# EAGLE board Octoprober (EAGLE 6.5.0)
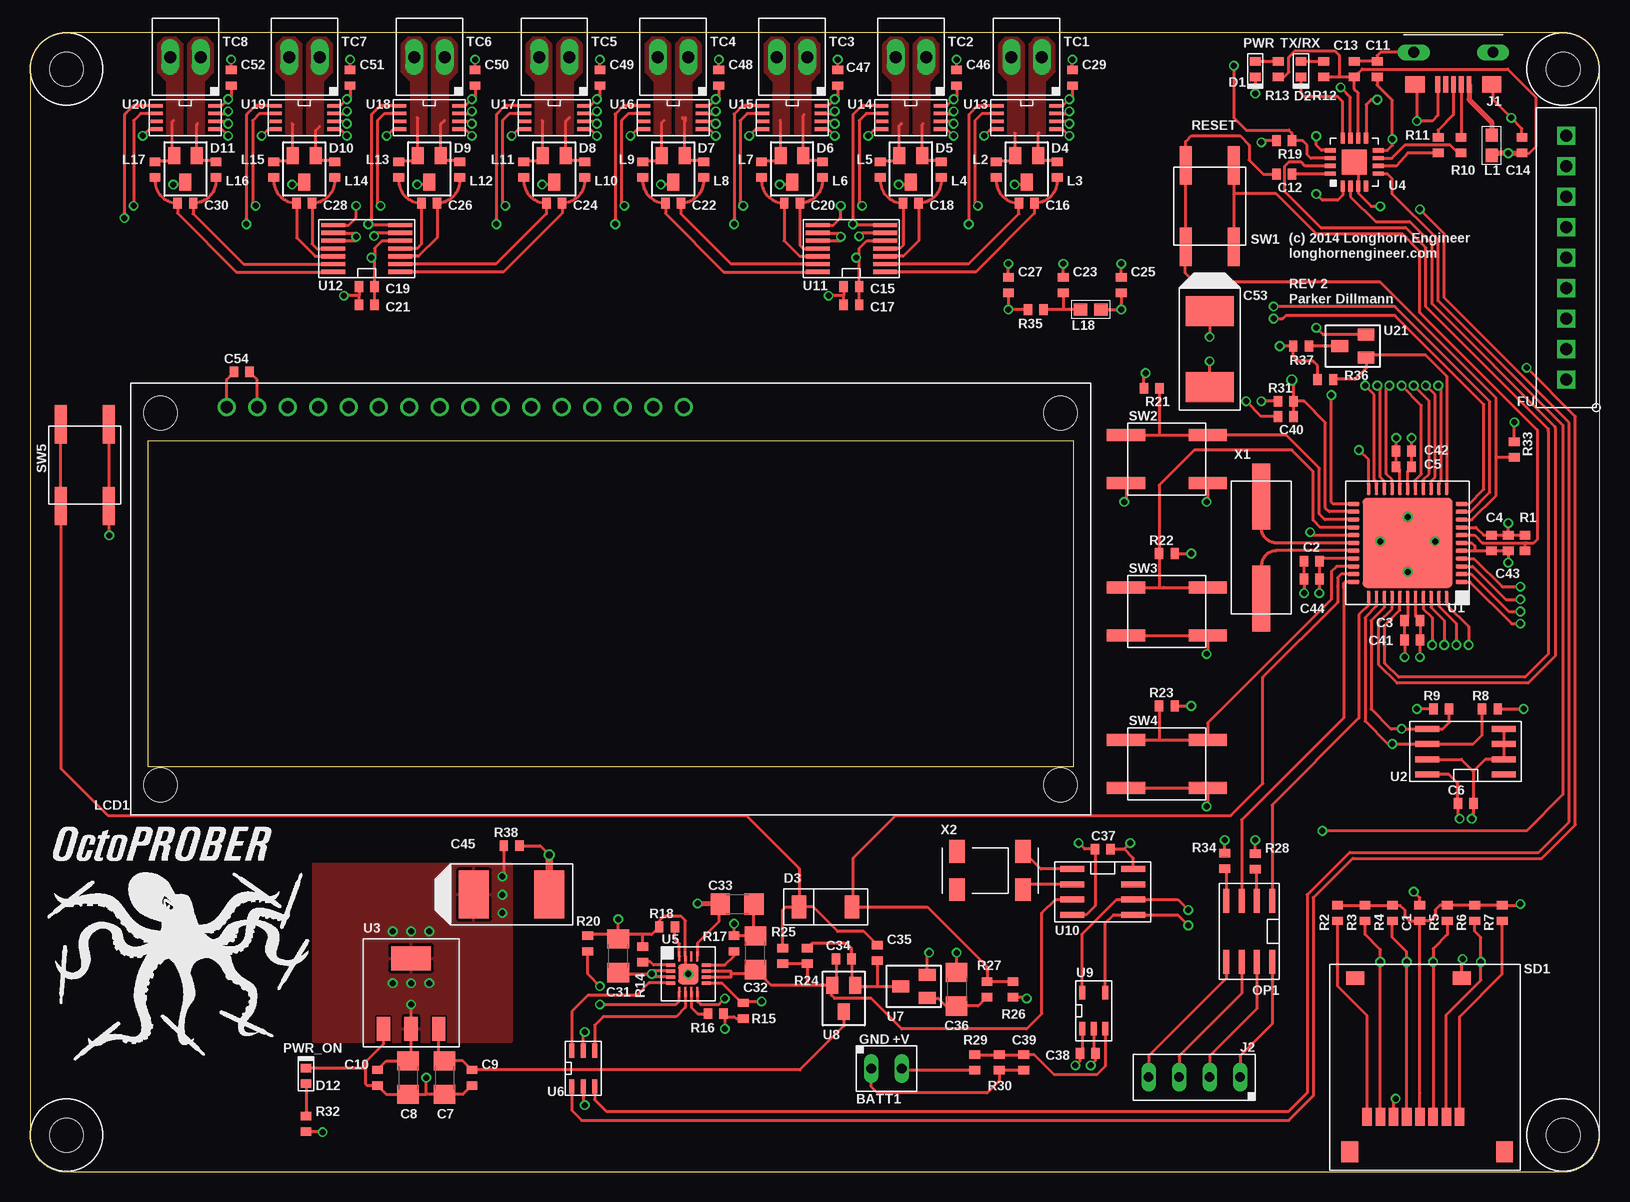
[diagram p0: board, top side]
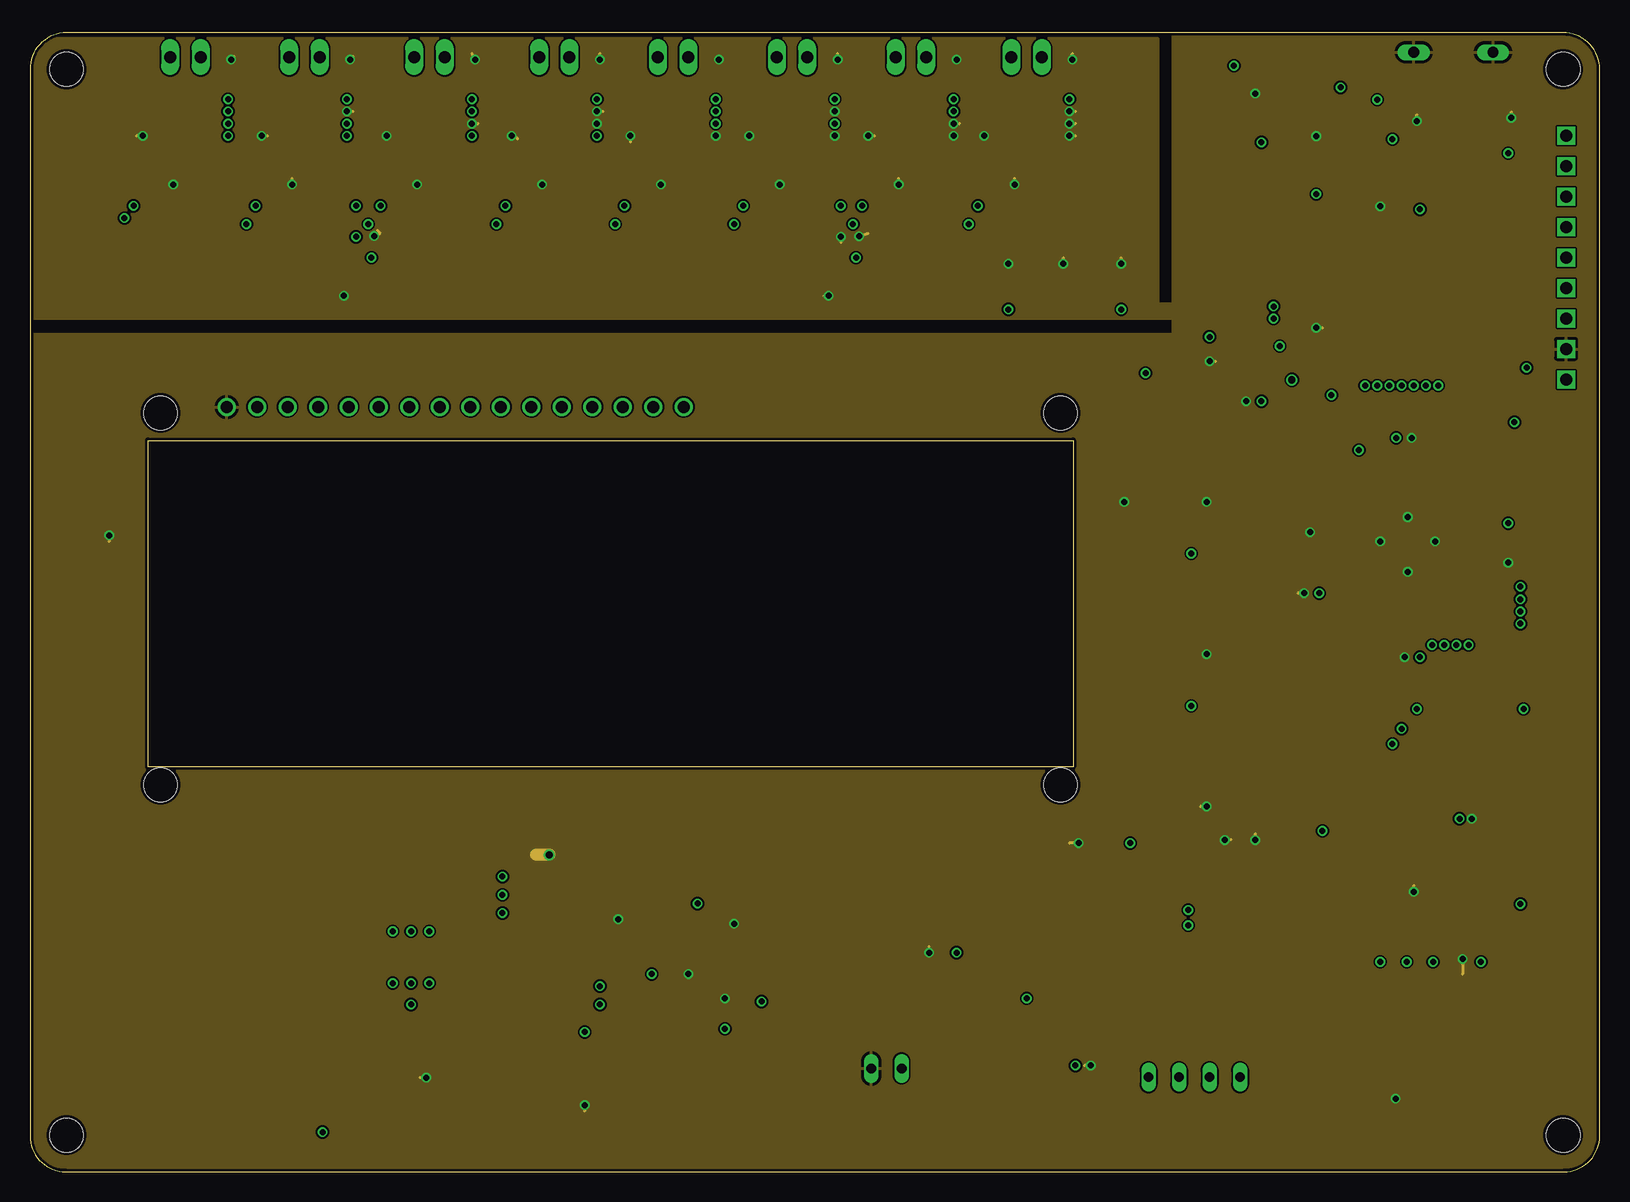
[diagram p1: board, inner layer Route2]
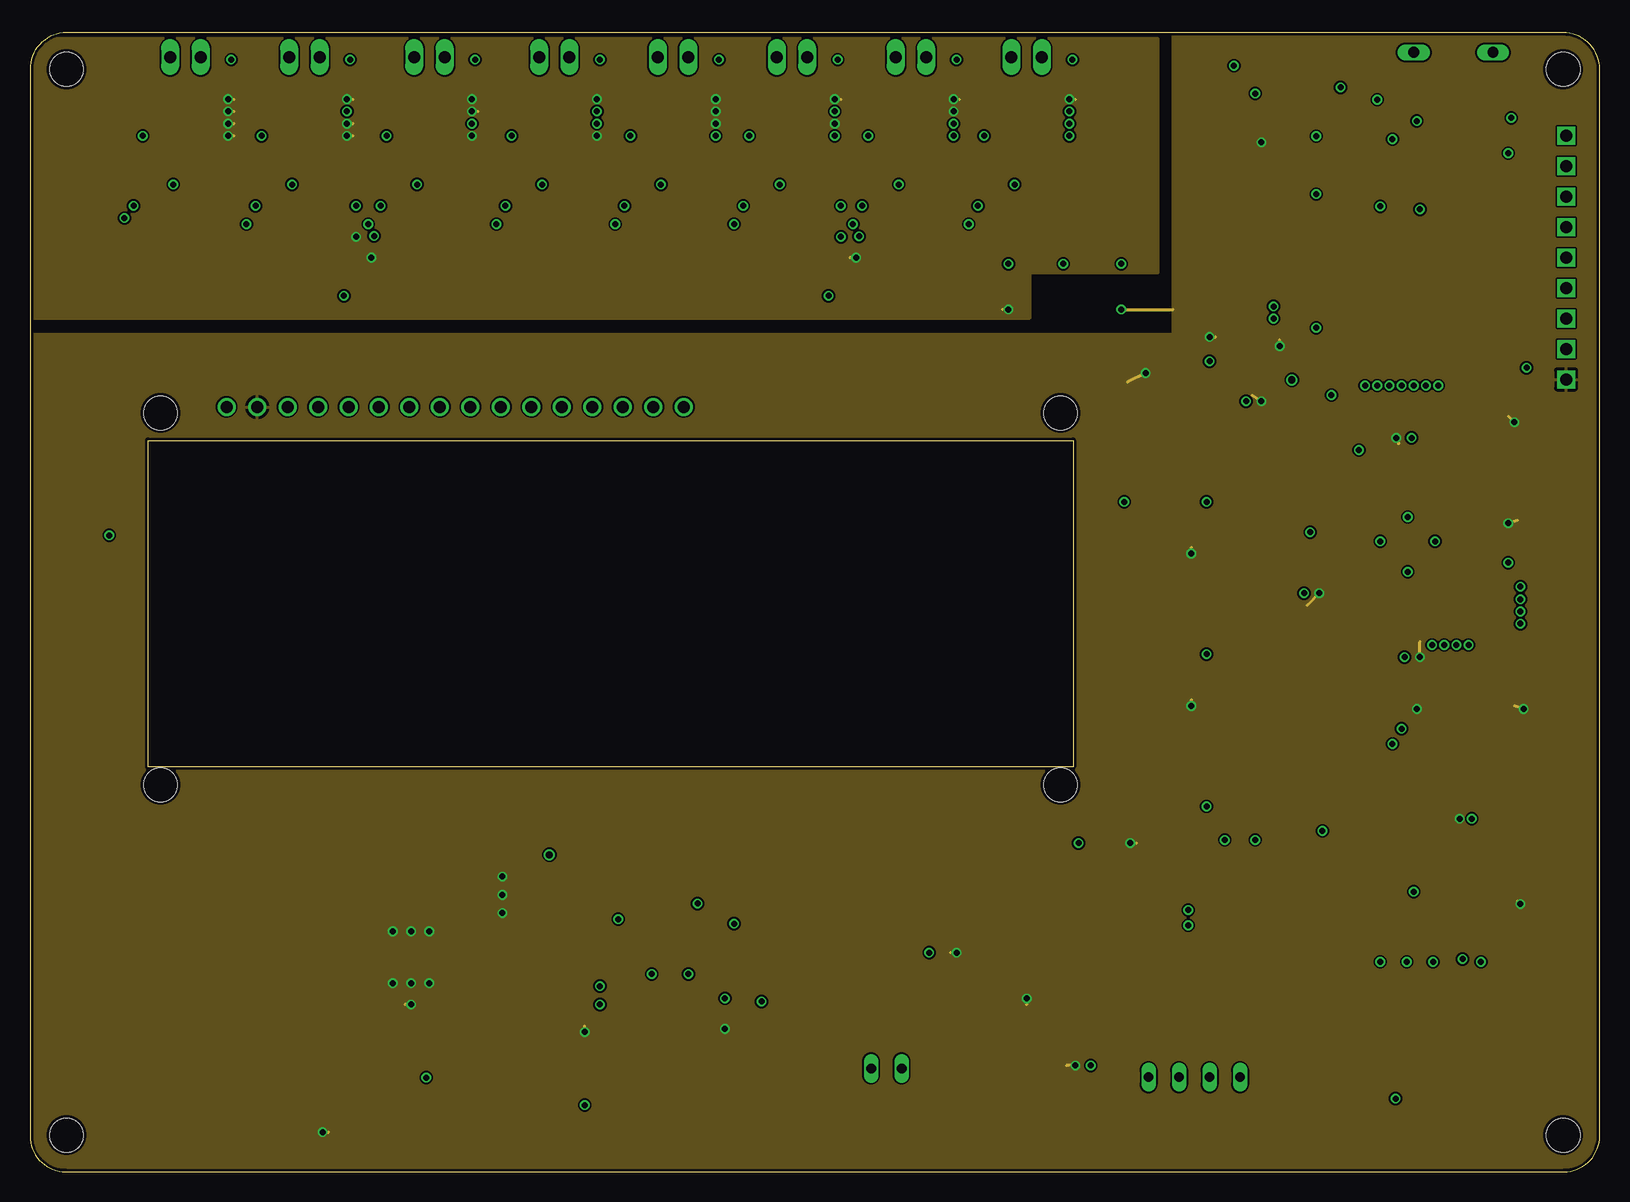
[diagram p2: board, inner layer Route15]
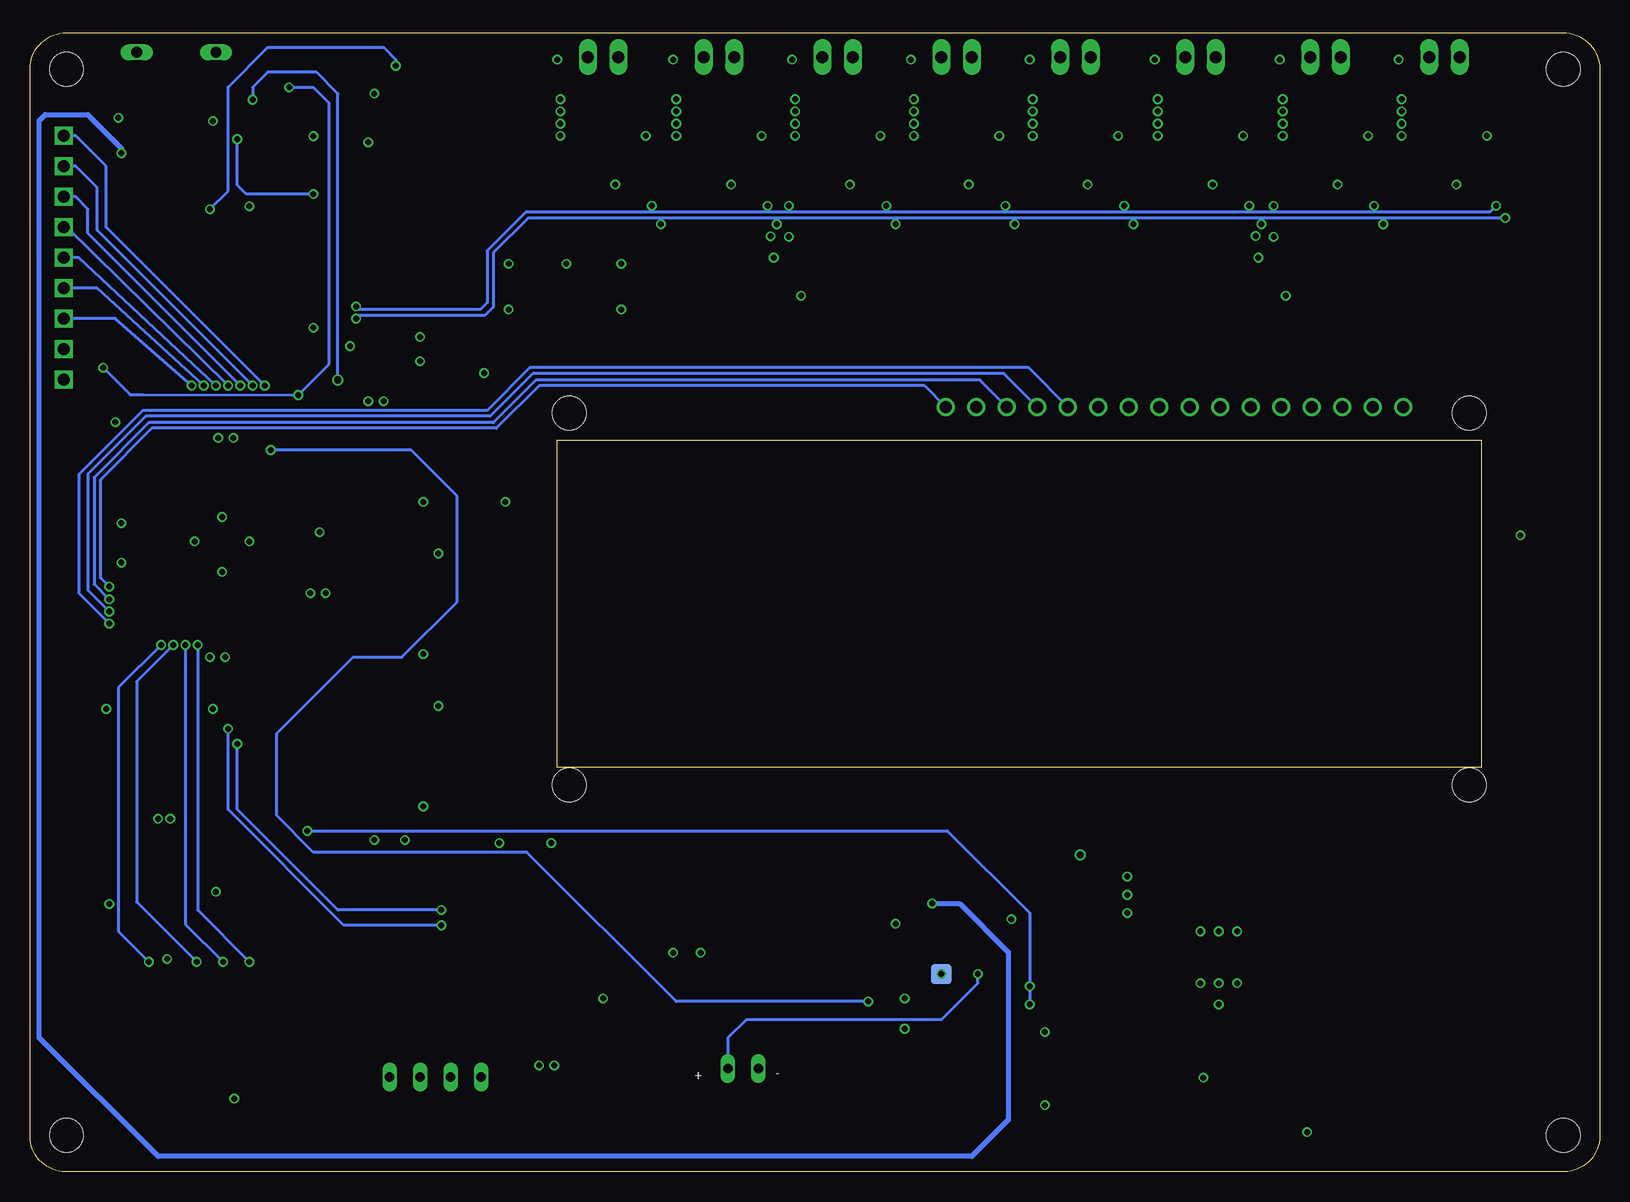
[diagram p3: board, bottom side, seen from below]

Size 130.81 x 94.96 mm. Coordinates in mm from the lower left corner, seen from the top.
Outline: 130.81,2.97 130.81,91.91 arc90 127.75,94.96 3.06,94.96 arc90 0,91.91 0,2.97 arc90 2.97,0 127.84,0 arc90 130.81,2.97
Copper layers (1*2*15*16): Top 0.035mm / dielectric 0.2mm / Route2 0.0175mm / dielectric 1.1mm / Route15 0.0175mm / dielectric 0.2mm / Bottom 0.035mm
Design rules "Seeed_4_Layer_DRU": minimum track width 6mil, minimum drill 12mil, track to track 6mil, track to pad 6mil, pad to pad 6mil, via to via 6mil, smd to smd 0mil, copper to edge 10mil, drill to drill 10mil, minimum pad ring 6mil, minimum via ring 6mil, stop-mask expansion 2mil, vias tented up to drill 25mil, thermal gap 10mil
tRestrict: area 100.2,44.9 to 105.2,59.1

## Footprints (pad centres in the part's own frame; a part is rotated, then mirrored left to right if it is on the bottom)
HEADER_01X02_PTH = drill 0.8 long: 1 0,0; 2 2.54,0
0402 = smd 0.7 x 0.9: 1 -0.65,0; 2 0.65,0
1206 = smd 1.6 x 1.8: 1 -1.4,0; 2 1.4,0
CASE_D = smd 2.5 x 4: N 3.15,0; P -3.15,0
LED_0402 = smd 0.7 x 0.9: ANODE 0.65,0; CATHODE -0.65,0
SOD-128 = smd 1.2 x 1.9: ANODE 2.2,0; CATHODE -2.2,0
SOT-23 = smd 1 x 1.4: 1 -0.95,-1.1; 2 0.95,-1.1; 3 0,1.1
HEADER_01X09_PTH = drill 1 square: 1 -10.16,0; 2 -7.62,0; 3 -5.08,0; 4 -2.54,0; 5 0,0; 6 2.54,0; 7 5.08,0; 8 7.62,0; 9 10.16,0
10118193-0001LF = smd 0.4 x 1.35: 1 -1.3,2.54; 2 -0.65,2.54; 3 0,2.54; 4 0.65,2.54; 5 1.3,2.54 | drill 0.9 long: S1 -3.3,-0.135; S2 3.3,-0.135 | smd 1.6 x 1.4: S3 -3.2,2.54; S4 3.2,2.54
HEADER_01X04_PTH = drill 0.8 long: 1 0,0; 2 2.54,0; 3 5.08,0; 4 7.62,0
0603 = smd 1.1 x 1: 1 -0.85,0; 2 0.85,0
CHAR_DISPLAY_1602_COUNTERSINK = drill 1: 1 8,-2; 2 10.54,-2; 3 13.08,-2; 4 15.62,-2; 5 18.16,-2; 6 20.7,-2; 7 23.24,-2; 8 25.78,-2; 9 28.32,-2; 10 30.86,-2; 11 33.4,-2; 12 35.94,-2; 13 38.48,-2; 14 41.02,-2; 15 43.56,-2; 16 46.1,-2 | hole 2.8: 2.5,-2.5; 77.5,-2.5; 77.5,-33.5; 2.5,-33.5
SOIC-8 = smd 0.5 x 2: 1 -1.905,-2.55; 2 -0.635,-2.55; 3 0.635,-2.55; 4 1.905,-2.55; 5 1.905,2.55; 6 0.635,2.55; 7 -0.635,2.55; 8 -1.905,2.55
502570-0893 = smd 0.8 x 1.5: 1 7.7,0; 2 6.6,0; 3 5.5,0; 4 4.4,0; 5 3.3,0; 6 2.2,0; 7 1.1,0; 8 0,0 | smd 1.4 x 1.73: SHIELD0 -3.75,2.9; SHIELD1 9.15,2.9 | smd 1.5 x 1.15: SHIELD2 8.7,-11.575; SHIELD3 -0.2,-11.575
EVQ-Q2203W = smd 3.2 x 1: 1 -3.4,-2; 2 3.4,-2; 3 -3.4,2; 4 3.4,2
HEADER_01X02_PTH_SCREWTERM = drill 1 long: 1 0,0; 2 2.54,0
QFN-44 = smd 1 x 0.33: 1 -4.5,3.25; 2 -4.5,2.6; 3 -4.5,1.95; 4 -4.5,1.3; 5 -4.5,0.65; 6 -4.5,0; 7 -4.5,-0.65; 8 -4.5,-1.3; 9 -4.5,-1.95; 10 -4.5,-2.6; 11 -4.5,-3.25; 23 4.5,-3.25; 24 4.5,-2.6; 25 4.5,-1.95; 26 4.5,-1.3; 27 4.5,-0.65; 28 4.5,0; 29 4.5,0.65; 30 4.5,1.3; 31 4.5,1.95; 32 4.5,2.6; 33 4.5,3.25 | smd 0.33 x 1: 12 -3.25,-4.5; 13 -2.6,-4.5; 14 -1.95,-4.5; 15 -1.3,-4.5; 16 -0.65,-4.5; 17 0,-4.5; 18 0.65,-4.5; 19 1.3,-4.5; 20 1.95,-4.5; 21 2.6,-4.5; 22 3.25,-4.5; 34 3.25,4.5; 35 2.6,4.5; 36 1.95,4.5; 37 1.3,4.5; 38 0.65,4.5; 39 0,4.5; 40 -0.65,4.5; 41 -1.3,4.5; 42 -1.95,4.5; 43 -2.6,4.5; 44 -3.25,4.5 | smd 7.5 x 7.5: PAD 0,0
SOIC-8_W = smd 0.5 x 2: 1 -1.905,-3.185; 2 -0.635,-3.185; 3 0.635,-3.185; 4 1.905,-3.185; 5 1.905,3.185; 6 0.635,3.185; 7 -0.635,3.185; 8 -1.905,3.185
SOT-223 = smd 1.1 x 2: COM1 0,0; IN -2.3,0; OUT 2.3,0 | smd 3.3 x 2: COM2 0,5.9
QFN-16 = smd 0.9 x 0.35: 1 -2,0.975; 2 -2,0.325; 3 -2,-0.325; 4 -2,-0.975; 9 2,-0.975; 10 2,-0.325; 11 2,0.325; 12 2,0.975 | smd 0.35 x 0.9: 5 -0.975,-2; 6 -0.325,-2; 7 0.325,-2; 8 0.975,-2; 13 0.975,2; 14 0.325,2; 15 -0.325,2; 16 -0.975,2 | smd 2.1 x 2.1: PAD 0,0
QFN-16_BOT_PAD = smd 0.85 x 0.28: 1 -1.475,0.75; 2 -1.475,0.25; 3 -1.475,-0.25; 4 -1.475,-0.75; 9 1.475,-0.75; 10 1.475,-0.25; 11 1.475,0.25; 12 1.475,0.75 | smd 0.28 x 0.85: 5 -0.75,-1.475; 6 -0.25,-1.475; 7 0.25,-1.475; 8 0.75,-1.475; 13 0.75,1.475; 14 0.25,1.475; 15 -0.25,1.475; 16 -0.75,1.475 | smd 1.7 x 1.7: PAD0 0,0 | smd 1.7 x 1.7 bottom: PAD1 0,0
TTSOP-6 = smd 0.4 x 1.2: 1 -0.95,-1.5; 2 0,-1.5; 3 0.95,-1.5; 4 0.95,1.5; 5 0,1.5; 6 -0.95,1.5
SOT-23A = smd 1.1 x 0.5: 1 -1.5,0.95; 2 -1.5,0; 3 -1.5,-0.95; 4 1.5,-0.95; 5 1.5,0.95
TTSOP-14 = smd 0.35 x 2: 1 -1.95,-2.8; 2 -1.3,-2.8; 3 -0.65,-2.8; 4 0,-2.8; 5 0.65,-2.8; 6 1.3,-2.8; 7 1.95,-2.8; 8 1.95,2.8; 9 1.3,2.8; 10 0.65,2.8; 11 0,2.8; 12 -0.65,2.8; 13 -1.3,2.8; 14 -1.95,2.8
MSOP-8 = smd 0.3 x 1: P$1 -0.975,-2.4; P$2 -0.325,-2.4; P$3 0.325,-2.4; P$4 0.975,-2.4; P$5 0.975,2.4; P$6 0.325,2.4; P$7 -0.325,2.4; P$8 -0.975,2.4
MOUNT_HOLE_2.8MM = hole 2.8: 0,0
HC-49/US_SM = smd 5.5 x 1.5: P$1 -4.25,0; P$2 4.25,0
8MM_X_3.8MM = smd 1.3 x 1.9: 1 -2.75,-1.6; 2 2.75,-1.6; 3 2.75,1.6; 4 -2.75,1.6

## Placement (x,y rotation side)
BATT1  MIKROE-1120  [HEADER_01X02_PTH]  70.1,8.6 0 top
C1  0.1uF  [0402]  115.82,21.56 90 top
C2  0.1uF  [0402]  106.81,50.9 180 top
C3  0.1uF  [0402]  115.19,45.94 180 top
C4  0.1uF  [0402]  121.79,52.42 270 top
C5  0.1uF  [0402]  114.49,58.77 0 top
C6  0.1uF  [0402]  119.63,30.7 0 top
C7  10uF  [1206]  34.54,7.84 270 top
C8  10uF  [1206]  31.5,7.84 270 top
C9  0.1uF  [0402]  36.83,7.84 270 top
C10  0.1uF  [0402]  28.96,7.84 270 top
C11  0.1uF  [0402]  112.27,91.92 90 top
C12  0.1uF  [0402]  104.52,83.15 180 top
C13  0.1uF  [0402]  110.36,91.92 90 top
C14  0.1uF  [0402]  124.33,85.57 90 top
C15  0.1uF  [0402]  68.45,73.79 180 top
C16  0.01uF  [0402]  83.06,80.74 0 top
C17  10uF  [0402]  68.45,72.26 180 top
C18  0.01uF  [0402]  73.41,80.74 0 top
C19  10uF  [0402]  28.07,73.79 180 top
C20  0.01uF  [0402]  63.5,80.74 0 top
C21  0.1uF  [0402]  28.07,72.26 180 top
C22  0.01uF  [0402]  53.59,80.74 0 top
C23  10uF  [0402]  86.11,73.91 90 top
C24  0.01uF  [0402]  43.69,80.74 0 top
C25  10uF  [0402]  90.93,73.91 90 top
C26  0.01uF  [0402]  33.27,80.74 0 top
C27  1uF  [0402]  81.53,73.91 90 top
C28  0.01uF  [0402]  22.86,80.74 0 top
C29  0.1uF  [0402]  86.87,91.19 270 top
C30  0.01uF  [0402]  12.95,80.74 0 top
C31  10uF  [1206]  49.02,18 90 top
C32  10uF  [1206]  60.45,18.26 90 top
C33  10uF  [1206]  58.93,22.32 0 top
C34  0.1uF  [0402]  67.82,17.75 0 top
C35  0.1uF  [0402]  70.61,18.26 270 top
C36  10uF  [1206]  77.22,15.21 270 top
C37  0.1uF  [0402]  89.41,26.89 180 top
C38  0.1uF  [0402]  88.14,9.87 0 top
C39  0.1uF  [0402]  82.8,9.11 270 top
C40  0.1uF  [0402]  104.65,62.96 180 top
C41  10uF  [0402]  115.19,44.32 180 top
C42  10uF  [0402]  114.49,60.07 0 top
C43  10uF  [0402]  123.19,52.42 270 top
C44  10uF  [0402]  106.81,49.4 180 top
C45  470uF  [CASE_D]  40.13,23.11 0 top
C46  0.1uF  [0402]  77.22,91.19 270 top
C47  0.1uF  [0402]  67.31,91.19 270 top
C48  0.1uF  [0402]  57.4,91.19 270 top
C49  0.1uF  [0402]  47.5,91.19 270 top
C50  0.1uF  [0402]  37.08,91.19 270 top
C51  0.1uF  [0402]  26.67,91.19 270 top
C52  0.1uF  [0402]  16.76,91.19 270 top
C53  470uF  [CASE_D]  98.3,68.58 270 top
C54  1uF  [0402]  17.65,66.67 0 top
D1  598-8070-107F  [LED_0402]  102.11,91.92 90 top
D2  598-8070-107F  [LED_0402]  105.92,91.92 90 top
D3  PMEG6030EP,115  [SOD-128]  66.29,22.07 0 top
D4  NUP2105LT1G  [SOT-23]  83.06,83.6 180 top
D5  NUP2105LT1G  [SOT-23]  73.41,83.6 180 top
D6  NUP2105LT1G  [SOT-23]  63.5,83.6 180 top
D7  NUP2105LT1G  [SOT-23]  53.59,83.6 180 top
D8  NUP2105LT1G  [SOT-23]  43.69,83.6 180 top
D9  NUP2105LT1G  [SOT-23]  33.27,83.6 180 top
D10  NUP2105LT1G  [SOT-23]  22.86,83.6 180 top
D11  NUP2105LT1G  [SOT-23]  12.95,83.6 180 top
D12  598-8070-107F  [LED_0402]  23,8 270 top
FU  [HEADER_01X09_PTH]  128.02,76.2 90 top
J1  10118193-0001LF  [10118193-0001LF]  118.62,93.19 180 top
J2  [HEADER_01X04_PTH]  100.84,7.87 180 top
L1  MI0603K300R-10  [0603]  121.79,85.57 270 top
L2  BK1005HM471-T  [0402]  80.52,83.53 270 top
L3  BK1005HM471-T  [0402]  85.6,83.53 90 top
L4  BK1005HM471-T  [0402]  75.95,83.53 90 top
L5  BK1005HM471-T  [0402]  70.87,83.53 270 top
L6  BK1005HM471-T  [0402]  66.04,83.53 90 top
L7  BK1005HM471-T  [0402]  60.96,83.53 270 top
L8  BK1005HM471-T  [0402]  56.13,83.53 90 top
L9  BK1005HM471-T  [0402]  51.05,83.53 270 top
L10  BK1005HM471-T  [0402]  46.23,83.53 90 top
L11  BK1005HM471-T  [0402]  41.15,83.53 270 top
L12  BK1005HM471-T  [0402]  35.81,83.53 90 top
L13  BK1005HM471-T  [0402]  30.73,83.53 270 top
L14  BK1005HM471-T  [0402]  25.4,83.53 90 top
L15  BK1005HM471-T  [0402]  20.32,83.53 270 top
L16  BK1005HM471-T  [0402]  15.49,83.53 90 top
L17  BK1005HM471-T  [0402]  10.41,83.53 270 top
L18  LK1608100K-T  [0603]  88.39,71.88 0 top
LCD1  [CHAR_DISPLAY_1602_COUNTERSINK]  8.38,65.75 0 top
OP1  ACPL-227  [SOIC-8]  101.6,20.03 180 top
R1  10K  [0402]  124.59,52.42 90 top
R2  10K  [0402]  108.97,21.56 90 top
R3  10K  [0402]  111.25,21.56 90 top
R4  10K  [0402]  113.54,21.56 90 top
R5  10K  [0402]  118.11,21.56 90 top
R6  10K  [0402]  120.4,21.56 90 top
R7  10K  [0402]  122.68,21.56 90 top
R8  10K  [0402]  121.67,38.58 0 top
R9  10K  [0402]  117.6,38.58 180 top
R10  22  [0402]  119.25,85.57 270 top
R11  22  [0402]  117.35,85.57 270 top
R12  330  [0402]  107.82,91.92 90 top
R13  330  [0402]  104.01,91.92 90 top
R14  10K  [0402]  51.05,18.13 90 top
R15  10K  [0402]  59.44,13.43 90 top
R16  10K  [0402]  57.15,13.18 180 top
R17  1.18K  [0402]  58.67,19.02 90 top
R18  1.13K  [0402]  53.09,20.41 180 top
R19  10K  [0402]  104.52,85.95 180 top
R20  10K  [0402]  46.48,19.02 270 top
R21  10K  [0402]  93.47,65.31 180 top
R22  10K  [0402]  94.74,51.53 0 top
R23  10K  [0402]  94.74,38.83 0 top
R24  100K  [0402]  64.77,18 270 top
R25  10K  [0402]  62.74,18 270 top
R26  100K  [0402]  81.92,15.21 270 top
R27  300K  [0402]  79.76,15.21 270 top
R28  120  [0402]  102.11,25.88 270 top
R29  100K  [0402]  78.74,9.11 90 top
R30  254K  [0402]  80.77,9.11 270 top
R31  10K  [0402]  104.65,64.23 0 top
R32  330  [0402]  23,4 90 top
R33  10K  [0402]  123.7,60.2 270 top
R34  120  [0402]  99.57,25.91 270 top
R35  1  [0402]  83.82,71.88 0 top
R36  10K  [0402]  107.95,66.04 180 top
R37  560  [0402]  105.92,68.83 180 top
R38  560  [0402]  40.13,27.18 0 top
SD1  502570-0893  [502570-0893]  119.13,4.57 180 top
SW1  EVQ-Q2203W  [EVQ-Q2203W]  98.3,80.49 270 top
SW2  EVQ-Q2203W  [EVQ-Q2203W]  94.74,59.4 0 top
SW3  EVQ-Q2203W  [EVQ-Q2203W]  94.74,46.7 0 top
SW4  EVQ-Q2203W  [EVQ-Q2203W]  94.74,34 0 top
SW5  EVQ-Q2203W  [EVQ-Q2203W]  4.57,58.9 90 top
TC1  282834-2  [HEADER_01X02_PTH_SCREWTERM]  84.33,92.93 180 top
TC2  282834-2  [HEADER_01X02_PTH_SCREWTERM]  74.68,92.93 180 top
TC3  282834-2  [HEADER_01X02_PTH_SCREWTERM]  64.77,92.93 180 top
TC4  282834-2  [HEADER_01X02_PTH_SCREWTERM]  54.86,92.93 180 top
TC5  282834-2  [HEADER_01X02_PTH_SCREWTERM]  44.96,92.93 180 top
TC6  282834-2  [HEADER_01X02_PTH_SCREWTERM]  34.54,92.93 180 top
TC7  282834-2  [HEADER_01X02_PTH_SCREWTERM]  24.13,92.93 180 top
TC8  282834-2  [HEADER_01X02_PTH_SCREWTERM]  14.22,92.93 180 top
U1  P8X32A-M44  [QFN-44]  114.81,52.42 180 top
U2  CAT24C512WI-GT3  [SOIC-8_W]  119.63,35.02 90 top
U3  ADP3338AKCZ-3.3-RL  [SOT-223]  31.75,11.91 0 top
U4  FT230XQ-R  [QFN-16]  110.36,84.17 90 top
U5  BQ24075RGTT  [QFN-16_BOT_PAD]  54.86,16.48 0 top
U6  74HC2G04GV,125  [TTSOP-6]  46.1,8.6 0 top
U7  PMV22EN,215  [SOT-23]  73.66,15.46 90 top
U8  PMV160UP,215  [SOT-23]  67.82,14.45 180 top
U9  MCP3021A5T-E/OT  [SOT-23A]  88.65,13.43 90 top
U10  DS1340Z-33+  [SOIC-8]  89.41,23.34 270 top
U11  MCP3424-E/ST  [TTSOP-14]  68.45,76.96 90 top
U12  MCP3424-E/ST  [TTSOP-14]  28.07,76.96 90 top
U13  AT30TSE752-XM8-T  [MSOP-8]  83.06,87.88 270 top
U14  AT30TSE752-XM8-T  [MSOP-8]  73.41,87.88 270 top
U15  AT30TSE752-XM8-T  [MSOP-8]  63.5,87.88 270 top
U16  AT30TSE752-XM8-T  [MSOP-8]  53.59,87.88 270 top
U17  AT30TSE752-XM8-T  [MSOP-8]  43.69,87.88 270 top
U18  AT30TSE752-XM8-T  [MSOP-8]  33.27,87.88 270 top
U19  AT30TSE752-XM8-T  [MSOP-8]  22.86,87.88 270 top
U20  AT30TSE752-XM8-T  [MSOP-8]  12.95,87.88 270 top
U21  PMV22EN,215  [SOT-23]  110.24,68.83 90 top
U$1  LHE_FRAME  [LHE_FRAME]  104.9,72.36 0 top
U$2  OCTOPROBER_LOGONORMAL  [OCTOPROBER_LOGO]  0.51,9.11 0 top
U$3  [MOUNT_HOLE_2.8MM]  3.05,91.92 0 top
U$4  [MOUNT_HOLE_2.8MM]  127.76,91.92 0 top
U$5  [MOUNT_HOLE_2.8MM]  3.05,3.05 0 top
U$6  [MOUNT_HOLE_2.8MM]  127.76,3.05 0 top
X1  ABLS3-6.000MHZ-D4Y-T  [HC-49/US_SM]  102.62,52.04 90 top
X2  ABS25-32.768KHz-1-T  [8MM_X_3.8MM]  80.01,25.11 180 top

## Library data of the parts
BATT1 FU J1 J2 SD1 TC1-TC8 U$3-U$6 = PP_Connectors
C1-C54 D3-D11 L1-L18 R1-R38 = PP_Passives
D1 D2 D12 = PP_LED
LCD1 = PP_Displays
OP1 U1 U2 U4 U6 U9-U20 = PP_DigitalIC
SW1-SW5 = PP_Electromechanical
U3 U5 = PP_PowerIC
U7 U8 U21 = PP_DiscreteSemi
U$1 = PP_Aesthetics; DNAME: Parker Dillmann; REVNUM: REV 2
U$2 = PP_Aesthetics
X1 X2 = PP_FreqCtrl

## Nets
3.3V: C1.1 C2.1 C3.1 C4.1 C5.1 C6.1 C8.1 C10.1 C25.1 C36.1 C37.1 C38.1 C41.1 C42.1 C43.1 C44.1 C45.P C53.P C54.2 FU.1 L18.2 LCD1.2 R1.2 R2.2 R3.2 R4.2 R5.2 R6.2 R7.2 R8.2 R9.2 R15.1 R16.1 R19.2 R21.2 R22.2 R23.2 R26.2 R31.1 R32.1 R33.1 R36.2 R37.2 R38.1 SD1.5 U1.8 U1.18 U1.30 U1.40 U2.8 U3.COM1 U3.COM2 U6.5 U9.1 U10.8
3.3V_ANALOG: C15.1 C17.1 C19.1 C21.1 C27.1 C29.2 C46.2 C47.2 C48.2 C49.2 C50.2 C51.2 C52.2 R35.1 U11.5 U12.5 U12.9 U12.10 U13.P$8 U14.P$7 U14.P$8 U15.P$6 U15.P$8 U16.P$6 U16.P$7 U16.P$8 U17.P$5 U17.P$8 U18.P$5 U18.P$7 U18.P$8 U19.P$5 U19.P$6 U19.P$8 U20.P$5 U20.P$6 U20.P$7 U20.P$8
3V3OUT: C11.1 U4.1 U4.8
!PWREN: R19.1 U4.14 U6.3
!SLEEP: U1.23 U4.11 U6.1
A_0: C39.1 R29.2 R30.1 U9.3
BCD_CHARGER: R20.2 U4.5 U5.5
CHARGING: R15.2 U1.22 U5.9
D+: J1.3 R11.1
D-: J1.2 R10.1
EXT0: OP1.1 U1.34
EXT1: OP1.3 U1.33
EXT_CON_0: J2.1 OP1.8
EXT_CON_1: J2.2 OP1.7
EXT_CON_2: J2.3 OP1.6
EXT_CON_3: J2.4 OP1.5
FT230_RST: C40.1 R31.2 U1.24 U4.9
GND: BATT1.1 C1.2 C2.2 C3.2 C4.2 C5.2 C6.2 C7.2 C8.2 C9.2 C10.2 C11.2 C13.2 C14.2 C15.2 C17.2 C19.2 C21.2 C23.2 C25.2 C27.2 C29.1 C31.2 C32.2 C33.2 C37.2 C38.2 C39.2 C40.2 C41.2 C42.2 C43.2 C44.2 C45.N C46.1 C47.1 C48.1 C49.1 C50.1 C51.1 C52.1 C53.N C54.1 D1.CATHODE D4.3 D5.3 D6.3 D7.3 D8.3 D9.3 D10.3 D11.3 D12.CATHODE FU.2 J1.5 J1.S1 J1.S2 J1.S3 J1.S4 LCD1.1 R14.2 R17.2 R18.2 R20.1 R28.1 R30.2 R34.1 R38.2 SD1.3 SD1.SHIELD0 SD1.SHIELD1 SD1.SHIELD2 SD1.SHIELD3 SW2.1 SW2.2 SW3.1 SW3.2 SW4.1 SW4.2 SW5.1 SW5.2 U1.5 U1.6 U1.17 U1.27 U1.39 U2.2 U2.3 U2.4 U2.7 U3.IN U4.3 U4.13 U4.PAD U5.8 U5.15 U5.PAD0 U5.PAD1 U6.2 U7.2 U9.2 U10.4 U11.6 U11.9 U11.10 U12.6 U13.P$4 U13.P$5 U13.P$6 U13.P$7 U14.P$4 U14.P$5 U14.P$6 U15.P$4 U15.P$5 U15.P$7 U16.P$4 U16.P$5 U17.P$4 U17.P$6 U17.P$7 U18.P$4 U18.P$6 U19.P$4 U19.P$7 U20.P$4 U21.2
ILM: R17.1 U5.12
IRQ: R2.1 SD1.1
ISET: R18.1 U5.16
LCD_CS: LCD1.16 U1.4
LCD_SCL: LCD1.12 U1.1
LCD_SDI: LCD1.14 U1.3
LCD_SDO: LCD1.13 U1.2
N$1: D2.ANODE R12.2
N$2: D4.2 L2.1 TC1.2
N$3: D1.ANODE R13.2
N$4: C35.1 D3.CATHODE R25.1 SW5.3 SW5.4
N$5: C36.2 R27.2 U7.1
N$6: OP1.2 R28.2
N$7: D4.1 L3.2 TC1.1
N$8: D5.2 L5.1 TC2.2
N$9: D5.1 L4.2 TC2.1
N$10: D6.2 L7.1 TC3.2
N$11: D6.1 L6.2 TC3.1
N$12: D7.2 L9.1 TC4.2
N$13: D7.1 L8.2 TC4.1
N$14: D11.2 L17.1 TC8.2
N$15: D11.1 L16.2 TC8.1
N$16: D10.2 L15.1 TC7.2
N$17: D10.1 L14.2 TC7.1
N$18: D9.2 L13.1 TC6.2
N$19: D9.1 L12.2 TC6.1
N$20: D8.2 L11.1 TC5.2
N$21: D8.1 L10.2 TC5.1
N$22: D12.ANODE R32.2
N$24: OP1.4 R34.2
N$25: C23.1 L18.1 R35.2
N$28: R37.1 U21.3
P12: FU.3 U1.13
P13: FU.4 U1.14
P14: FU.5 U1.15
P15: FU.6 U1.16
P16: FU.7 U1.19
P17: FU.8 U1.20
P18: FU.9 U1.21
PGOOD: R16.2 U5.7
PWR_SW: D3.ANODE R26.1 R27.1 U1.32
PWREN: U5.6 U6.4
RES: R1.1 SW1.3 SW1.4 U1.7
RTC_X1: U10.1 X2.1
RTC_X2: U10.2 X2.4
RTS: C12.1 U4.16
RX: U1.37 U4.2
S_P_G: C34.2 C35.2 R24.1 U7.3 U8.1
SCL: R8.1 U1.35 U2.6 U9.5 U10.6
SCL_ADC: U1.10 U11.8 U12.8 U13.P$2 U14.P$2 U15.P$2 U16.P$2 U17.P$2 U18.P$2 U19.P$2 U20.P$2
SD_CS: R6.1 SD1.7 U1.44
SD_DI: R5.1 SD1.6 U1.43
SD_DO: R3.1 SD1.2 U1.41
SD_RW: R7.1 SD1.8
SD_SCLK: R4.1 SD1.4 U1.42
SDA: R9.1 U1.36 U2.5 U9.4 U10.5
SDA_ADC: U1.11 U11.7 U12.7 U13.P$1 U14.P$1 U15.P$1 U16.P$1 U17.P$1 U18.P$1 U19.P$1 U20.P$1
SHT_DRAIN: R36.1 U1.12 U21.1
SLEEP: U5.4 U6.6
SW_DWN: R23.1 SW4.3 SW4.4 U1.31
SW_SEL: R22.1 SW3.3 SW3.4 U1.26
SW_UP: R21.1 SW2.3 SW2.4 U1.25
SYS_V: C32.1 C34.1 R24.2 R25.2 U5.10 U5.11 U8.2 U10.3
SYS_V_SW: C7.1 C9.1 U3.OUT U8.3
TP_T+_0: C16.2 L3.1 U11.1
TP_T+_1: C18.2 L4.1 U11.3
TP_T+_2: C20.2 L6.1 U11.11
TP_T+_3: C22.2 L8.1 U11.13
TP_T+_4: C24.2 L10.1 U12.1
TP_T+_5: C26.2 L12.1 U12.3
TP_T+_6: C28.2 L14.1 U12.11
TP_T+_7: C30.2 L16.1 U12.13
TP_T-_0: C16.1 L2.2 U11.2
TP_T-_1: C18.1 L5.2 U11.4
TP_T-_2: C20.1 L7.2 U11.12
TP_T-_3: C22.1 L9.2 U11.14
TP_T-_4: C24.1 L11.2 U12.2
TP_T-_5: C26.1 L13.2 U12.4
TP_T-_6: C28.1 L15.2 U12.12
TP_T-_7: C30.1 L17.2 U12.14
TS: R14.1 U5.1
TX: U1.38 U4.15
TXRX_LED: D2.CATHODE U4.12
USB_RST: C12.2 R33.2 SW1.1 SW1.2 U1.9
USB_V0: J1.1 L1.1
USB_V1: C13.1 C14.1 C33.1 L1.2 R12.1 R13.1 U4.10 U5.13
USBDM: R10.2 U4.7
USBDP: R11.2 U4.6
VBATT: BATT1.2 C31.1 R29.1 U5.2 U5.3
X0: U1.29 X1.P$1
X1: U1.28 X1.P$2

## Tracks (layer width: path | path; a pad name or v marks a point on that pad's centre or on a via)
3.3V  (via drill 0.5)
  Top 0.254: U1.30 107.68,51.12 C2.1 C44.1 107.44,49.52 v107.44,48.23 | U1.40 115.46,46.32 C3.1 C41.1 115.82,44.32 v115.82,42.89 | U1.8 120.49,53.72 121.14,53.07 C4.1 C43.1 | U1.18 114.16,58.52 C5.1 C42.1 113.84,61.17 v113.86,61.18 | U2.8 118.24,33.12 118.98,32.37 C6.1 118.98,29.57 v119.13,29.43 | C10.1 29.71,9.24 C8.1 31.75,9.5 U3.COM1 v31.75,13.94 | SD1.5 115.82,6.57 C1.1 | C43.1 R1.2 | R8.2 v124.46,38.58 | R9.2 v115.57,38.58 | C1.1 116.7,20.91 117.09,21.3 117.09,21.81 117.49,22.21 R5.2 R6.2 R7.2 124.09,22.21 v124.21,22.32 | C1.1 114.95,20.91 114.55,21.3 114.55,21.81 114.16,22.21 R4.2 R3.2 R2.2 | R26.2 82.95,14.56 v83.06,14.45 | C36.1 v77.22,18.26 | U6.5 46.1,11.53 v46.23,11.65 | R15.1 58.82,12.78 58.67,12.92 58.05,12.92 R16.1 57.91,13.06 v57.91,11.91 | R22.2 v96.77,51.53 | R19.2 102.74,85.95 v102.62,85.82 | R23.2 v96.77,38.83 | U10.8 91.96,26.12 91.19,26.89 | C37.1 91.19,26.89 | 91.19,26.89 v91.69,27.4 | U9.1 87.7,10.08 C38.1 87.49,9.22 v87.12,8.86 | R31.1 v102.62,64.23 | R32.1 24.34,3.35 v24.38,3.3 | R33.1 v123.7,62.48 | C43.1 v123.19,54.07 | L18.2 v90.93,71.88 C25.1 | R21.2 92.82,66.44 v92.96,66.58 | C53.P v98.3,69.6 | R38.1 39.48,24.72 v39.37,24.61 | v104.14,68.83 R37.2 105.27,67.96 105.66,67.56 106.93,67.56 107.3,67.2 R36.2 | LCD1.2 18.92,66.06 C54.2
  Route15 0.254: v123.19,54.07 123.95,54.32 | v124.46,38.58 123.7,38.83 | v115.57,38.58 115.57,38.83 | v119.13,29.43 119.13,29.18 | v124.21,22.32 123.95,22.57 | v83.06,14.45 83.06,13.94 | v77.22,18.26 76.71,18.26 | v46.23,11.65 46.23,12.16 | v57.91,11.91 58.17,11.91 | v115.82,42.89 115.82,44.16 | v107.44,48.23 106.43,47.21 | v96.77,51.53 96.77,52.04 | v92.96,66.58 91.44,65.82 | v102.62,85.82 102.62,85.57 | v96.77,38.83 96.77,39.34 | v113.86,61.18 114.05,60.67 | v31.75,13.94 31.24,13.94 | v91.69,27.4 92.2,27.4 | v87.12,8.86 86.36,8.86 | v102.62,64.23 101.85,64.74 | v24.38,3.3 24.89,3.3 | v123.7,62.48 123.19,62.99 | v90.93,71.88 95.25,71.88 | v98.3,69.6 98.81,69.6 | v104.14,68.83 104.14,69.34
  other vias: 30.23,15.72 31.75,15.72 33.27,15.72 33.27,20.03 31.75,20.03 30.23,20.03 39.37,23.08 39.37,21.56
  pour Route15: 0.25,69.82 95.25,69.82 95.25,94.71 130.56,94.71 130.56,0.25 0.25,0.25
  pour Top: 40.13,10.89 40.13,25.62 23.62,25.62 23.62,10.89
3.3V_ANALOG  (via drill 0.5)
  Top 0.254: 28.72,76.2 C19.1 C21.1 | U12.5 29.35,77.61 28.72,76.98 28.72,76.2 | C17.1 C15.1 69.1,76.2 | U12.9 27.18,78.26 v27.18,77.94 27.18,77.61 U12.10 | R35.1 v81.53,71.88 C27.1 | 69.1,76.2 v68.83,76.2 | 69.1,76.2 69.1,76.98 69.74,77.61 U11.5 | 28.72,76.2 v28.45,76.2 | U13.P$8 86.06,88.86 v86.61,89.41 86.87,89.66 C29.2 | U14.P$8 76.41,88.86 v76.96,89.41 77.22,89.66 C46.2 | U14.P$7 76.78,88.21 v76.96,88.39 | U15.P$8 66.51,88.86 v67.06,89.41 67.31,89.66 C47.2 | U15.P$6 66.87,87.56 v67.06,87.38 | U16.P$6 56.97,87.56 v57.15,87.38 | U16.P$7 56.97,88.21 v57.15,88.39 | U16.P$8 56.6,88.86 v57.15,89.41 57.4,89.66 C48.2 | U17.P$5 46.7,86.91 v47.24,86.36 | U17.P$8 46.7,88.86 v47.24,89.41 47.5,89.66 C49.2 | U18.P$8 36.28,88.86 v36.83,89.41 37.08,89.66 C50.2 | U18.P$5 36.28,86.91 v36.83,86.36 | U18.P$7 36.65,88.21 v36.83,88.39 | U20.P$5 15.96,86.91 v16.51,86.36 | U20.P$6 16.33,87.56 v16.51,87.38 | U20.P$7 16.33,88.21 v16.51,88.39 | U20.P$8 15.96,88.86 v16.51,89.41 16.76,89.66 C52.2 | U19.P$8 25.87,88.86 v26.42,89.41 26.67,89.66 C51.2 | U19.P$6 26.23,87.56 v26.42,87.38 | U19.P$5 25.87,86.91 v26.42,86.36
  Route15 0.254: v27.18,77.94 27.43,77.98 | v68.83,76.2 68.33,76.2 | v81.53,71.88 81.03,71.88 | v28.45,76.2 28.19,76.2 | v86.61,89.41 87.12,89.41 | v76.96,89.41 77.47,89.41 | v76.96,88.39 77.22,88.39 | v67.06,89.41 67.56,89.41 | v67.06,87.38 67.31,87.38 | v57.15,87.38 57.4,87.38 | v57.15,88.39 57.4,88.39 | v57.15,89.41 57.4,89.41 | v47.24,86.36 47.5,86.36 | v47.24,89.41 47.5,89.41 | v36.83,89.41 37.08,89.41 | v36.83,86.36 37.08,86.36 | v36.83,88.39 37.34,88.39 | v16.51,86.36 17.02,86.36 | v16.51,87.38 17.02,87.38 | v16.51,88.39 17.02,88.39 | v16.51,89.41 17.02,89.41 | v26.42,89.41 26.92,89.41 | v26.42,87.38 26.92,87.38 | v26.42,86.36 26.92,86.36
  pour Route15: 0.25,94.49 93.98,94.49 93.98,74.93 83.31,74.93 83.31,71.12 0.25,71.12
3V3OUT  (via drill 0.5)
  Top 0.254: U4.8 113.12,85.14 113.54,85.57 v113.54,86.07 113.54,89.32 112.27,90.59 C11.1 | U4.1 109.39,81.42 108.97,80.99 107.7,80.99 v107.19,81.5
  Bottom 0.254: v107.19,81.5 112.78,81.5 113.54,82.26 v113.54,86.07
!PWREN  (via drill 0.5)
  Top 0.254: U4.14 106.74,84.49 106.43,84.8 106.43,85.57 106.05,85.95 R19.1 105.16,85.96 105.16,86.58 104.9,86.84 101.35,86.84 100.33,87.85 v100.33,92.2 | U6.3 47.05,6 48.01,5.05 104.9,5.05 106.43,6.57 106.43,23.08 109.98,26.64 125.73,26.64 128.27,29.18 128.27,62.45 117.86,72.87 117.86,78.2 v115.82,80.23
  Bottom 0.254: v115.82,80.23 114.3,81.76 114.3,90.42 111,93.73 101.35,93.73 100.33,92.71 v100.33,92.2
!SLEEP  (via drill 0.5)
  Top 0.254: U1.23 108.64,55.67 108.46,55.85 v108.46,64.74 | U4.11 110.04,89.57 v109.22,90.39 | U6.1 45.15,5.11 45.97,4.29 104.9,4.29 106.93,6.32 106.93,22.83 110.24,26.13 125.98,26.13 128.78,28.92 128.78,62.96 v124.71,67.02
  Bottom 0.254: v109.22,90.39 107.19,90.39 105.92,89.12 105.92,67.28 v108.46,64.74 121.41,64.77 122.46,64.77 v124.71,67.02
A_0
  Top 0.254: R29.2 R30.1 C39.1 | 82.66,9.76 82.8,9.62 C39.1 | U9.3 89.6,8.79 88.9,8.1 85.34,8.1 83.68,9.76 C39.1
BCD_CHARGER  (via drill 0.5)
  Top 0.254: U4.5 113.12,83.19 113.54,82.77 113.54,81.5 117.35,77.69 117.35,72.61 127.73,62.23 127.73,31.43 124.71,28.42 v107.7,28.42 | v47.5,15.46 46.48,16.48 R20.2 | v47.5,13.94 53.85,13.94 54.11,14.2 U5.5
  Bottom 0.254: v47.5,13.94 v47.5,15.46 47.5,21.56 54.36,28.42 v107.7,28.42
CHARGING  (via drill 0.5)
  Top 0.254: U5.9 57.65,15.73 59.18,14.19 R15.2 59.55,14.19 v60.96,14.19 | U1.22 111.56,59.35 v110.74,60.17
  Bottom 0.254: v60.96,14.19 76.96,14.19 89.41,26.64 107.19,26.64 110.24,29.69 110.24,36.54 103.89,42.89 99.82,42.89 95.21,47.5 95.21,56.32 99.06,60.17 v110.74,60.17
D+
  Top 0.254: J1.3 118.62,88.11 117.35,86.84 R11.1
D-
  Top 0.254: J1.2 119.27,86.23 R10.1
EXT0
  Top 0.254: U1.34 111.56,47.26 110.74,46.45 110.74,37.81 103.5,30.57 OP1.1
EXT1
  Top 0.254: U1.33 109.97,49.17 109.58,49.17 109.47,49.06 109.47,48.67 109.47,37.85 100.97,29.34 OP1.3
EXT_CON_0
  Top 0.254: OP1.8 103.5,12.32 100.84,9.65 J2.1
EXT_CON_1
  Top 0.254: OP1.7 102.23,13.59 98.3,9.65 J2.2
EXT_CON_2
  Top 0.254: OP1.6 100.97,14.86 95.76,9.65 J2.3
EXT_CON_3
  Top 0.254: OP1.5 99.69,16.13 93.22,9.65 J2.4
FT230_RST  (via drill 0.5, 0.6)
  Top 0.254: U1.24 108.27,55.02 107.95,55.34 107.95,62.45 106.17,64.23 R31.2 | R31.2 105.3,65.87 v105.16,66.01 | v112.27,89.38 111.76,89.38 111.34,88.95 U4.9 | C40.1 R31.2
  Bottom 0.254: v105.16,66.01 105.16,89.88 106.93,91.66 111,91.66 112.27,90.39 v112.27,89.38
GND  (via drill 0.5, 0.6)
  Top 0.254: U1.39 114.81,46.21 C3.2 C41.2 114.55,44.32 v114.55,42.89 | U1.5 120.4,51.77 | 120.4,51.77 C4.2 122.95,51.77 123.19,51.53 | U1.17 114.81,58.37 C5.2 C42.2 115.14,61.17 v115.13,61.18 | U1.6 120.14,52.42 120.4,52.16 120.4,51.77 | U4.PAD 110.69,83.84 U4.3 110.69,81.56 111.76,80.49 v112.52,80.49 | U5.PAD1 54.61,16.48 U5.15 54.61,20.94 54.25,21.3 52.83,21.3 52.44,20.91 R18.2 51.8,19.78 51.05,19.78 | U1.27 110.49,53.05 106.93,53.05 v106.68,53.31 | 123.19,51.53 v123.19,50.77 | D1.CATHODE v102.11,89.88 | C13.2 C11.2 112.27,93.05 112.54,93.32 J1.S2 | U4.13 107.61,85.14 107.19,85.57 v107.19,86.33 | v120.14,29.43 120.28,29.57 C6.2 120.28,33.38 | 120.28,33.38 121.28,34.38 U2.2 U2.3 U2.4 | U2.7 119.28,34.38 120.28,33.38 | C1.2 115.82,22.83 v115.32,23.34 | U7.2 74.76,18.09 v74.93,18.26 | C9.2 36.08,6.44 C7.2 33.02,6.44 | 33.02,6.44 v33.02,7.84 | 33.02,6.44 C8.2 29.71,6.44 C10.2 28.08,7.19 27.94,7.33 27.94,8.65 | U6.2 46.1,5.68 v46.23,5.56 | C33.2 60.33,19.78 C32.2 R17.2 v58.67,20.67 | 51.05,19.78 46.59,19.78 R20.1 | R14.2 51.05,19.78 | C31.2 v49.02,21.05 | U5.8 55.61,14.2 55.88,13.94 57.4,13.94 v57.91,14.45 | SW4.1 SW4.2 98.14,30.55 v98.04,30.45 | SW3.1 SW3.2 98.14,43.25 v98.04,43.15 | SW2.2 98.14,55.95 v98.04,55.85 | SW2.1 91.34,56 v91.19,55.85 | C14.2 124.33,86.96 v123.44,87.85 121.92,89.38 121.92,90.54 J1.S3 | J1.5 117.32,88.08 116.84,87.6 v115.57,87.6 115.57,90.49 J1.S4 | SW5.2 SW5.1 6.57,53.09 v6.6,53.05 | R28.1 v102.11,27.65 | BATT1.1 70.1,7.08 70.61,6.57 79.76,6.57 80.77,7.59 R30.2 C39.2 | U10.4 88.01,21.43 88.76,22.18 C37.2 87.88,26.89 v87.38,27.4 | U9.2 88.65,10.02 C38.2 88.79,9.25 v88.39,8.86
  Top 0.254: U3.IN 29.45,10.62 27.94,9.11 27.94,8.65 | C40.2 102.62,62.96 v101.35,64.23 | SD1.SHIELD3 119.33,17.68 v119.38,17.73 | D12.CATHODE 27.94,8.65 | R34.1 v99.57,27.65 | SD1.3 113.63,5.93 v113.79,6.1 | C2.2 C44.2 106.17,49.52 v106.17,48.23 | C23.2 v86.11,75.69 | 67.82,73.8 C15.2 67.8,73.03 | U11.9 67.56,78.26 v67.57,77.94 67.56,77.61 U11.10 | C17.2 67.8,73.03 | 67.8,73.03 v66.55,73.03 | C21.2 27.42,73.03 | 27.42,73.03 v26.16,73.03 | C19.2 27.42,73.03 | C27.2 v81.53,75.69 | U12.6 28.93,78.26 v28.68,78.01 | U11.6 69.37,78.26 v69.09,77.98 | D4.3 82.86,82.3 v82.04,82.3 | D5.3 73.2,82.3 v72.39,82.3 | D6.3 63.3,82.3 v62.48,82.3 | D7.3 53.39,82.3 v52.58,82.3 | D8.3 43.49,82.3 v42.67,82.3 | D10.3 22.66,82.3 v21.84,82.3 | D9.3 33.07,82.3 v32.26,82.3 | D11.3 12.75,82.3 v11.94,82.3 | C43.2 123.19,51.53 | C25.2 v90.93,75.69 | U13.P$7 86.43,88.21 v86.61,88.39 | U13.P$6 86.43,87.56 v86.61,87.38 | U13.P$5 86.06,86.91 v86.61,86.36 | U13.P$4 80.05,86.91 v79.5,86.36 | U14.P$6 76.78,87.56 v76.96,87.38 | U14.P$5 76.41,86.91 v76.96,86.36 | U14.P$4 70.4,86.91 v69.85,86.36 | U15.P$7 66.87,88.21 v67.06,88.39 | U15.P$5 66.51,86.91 v67.06,86.36 | U15.P$4 60.49,86.91 v59.94,86.36 | U16.P$4 50.59,86.91 v50.04,86.36 | U16.P$5 56.6,86.91 v57.15,86.36 | U17.P$7 47.06,88.21 v47.24,88.39 | U17.P$6 47.06,87.56 v47.24,87.38 | U17.P$4 40.68,86.91 v40.13,86.36 | U18.P$6 36.65,87.56 v36.83,87.38 | U18.P$4 30.27,86.91 v29.72,86.36 | U20.P$4 9.95,86.91 v9.4,86.36 | U19.P$4 19.85,86.91 v19.3,86.36 | U19.P$7 26.23,88.21 v26.42,88.39 | C29.1 v86.87,92.71 | C46.1 v77.22,92.71 | C47.1 v67.31,92.71 | C48.1 v57.4,92.71 | C49.1 v47.5,92.71 | C50.1 v37.08,92.71 | C51.1 v26.67,92.71 | C52.1 v16.76,92.71
  Top 0.254: C53.N v98.3,67.56 | R38.2 42.52,27.18 v43.28,26.42 | U21.2 107.76,69.78 v107.19,70.36 | LCD1.1 16.38,66.05 C54.1
  Top 0.61: C45.N v43.28,26.42
  Route2 0.254: v102.11,89.88 102.11,89.63 | v106.17,48.23 105.66,48.23 | v106.68,53.31 106.68,53.56 | v107.19,86.33 107.19,86.58 | v120.14,29.43 120.14,29.18 | v115.32,23.34 115.32,23.84 | v119.38,17.73 119.38,16.48 | v74.93,18.26 74.93,18.76 | v33.02,7.84 32.51,7.84 | v46.23,5.56 46.23,5.05 | v49.02,21.05 49.28,21.05 | v58.67,20.67 58.67,20.8 | v57.91,14.45 57.91,14.7 | v98.04,55.85 97.79,55.85 | v112.52,80.49 112.78,80.49 | v91.19,55.85 91.19,55.59 | v98.04,43.15 97.79,43.15 | v98.04,30.45 97.54,30.45 | v123.44,87.85 123.44,88.36 | v115.57,87.6 115.57,88.11 | v6.6,53.05 6.6,52.55 | v102.11,27.65 102.11,28.16 | v87.38,27.4 86.61,27.4 | v88.39,8.86 87.88,8.86 | v101.35,64.23 101.35,64.48 | v99.57,27.65 100.08,27.69 | v28.68,78.01 29.18,78.26 28.96,78.49 | v69.09,77.98 69.85,78.23 | v86.11,75.69 86.11,76.2 | v67.57,77.94 67.56,77.47 | v66.55,73.03 66.17,73.03 | v26.16,73.03 26.16,73.28 | v81.53,75.69 81.53,75.95 | v82.04,82.3 82.04,82.8 | v72.39,82.3 72.39,82.8 | v62.48,82.3 62.48,82.55 | v52.58,82.3 52.58,82.55 | v42.67,82.3 42.67,82.55 | v21.84,82.3 21.84,82.8 | v32.26,82.3 32.26,82.55 | v11.94,82.3 11.94,82.55 | v90.93,75.69 90.93,76.2 | v86.61,88.39 87.12,88.39 | v86.61,87.38 87.12,87.38 | v86.61,86.36 87.12,86.36 | v79.5,86.36 79.76,86.36 | v76.96,87.38 77.47,87.38 | v76.96,86.36 77.22,86.36 | v69.85,86.36 70.36,86.36 | v67.06,88.39 67.31,88.39 | v67.06,86.36 67.31,86.36 | v59.94,86.36 59.69,86.36 | v50.04,86.36 50.04,85.85 | v57.15,86.36 57.4,86.36 | v47.24,88.39 47.75,88.39 | v47.24,87.38 47.5,87.38 | v40.13,86.36 40.39,86.36 40.64,86.11 | v36.83,87.38 37.34,87.38 | v29.72,86.36 29.46,86.36 | v9.4,86.36 8.89,86.36 | v19.3,86.36 19.81,86.36 | v26.42,88.39 26.92,88.39
  Route2 0.254: v86.87,92.71 86.87,93.22 | v77.22,92.71 77.22,92.96 | v67.31,92.71 67.31,93.22 | v57.4,92.71 57.4,92.96 | v47.5,92.71 47.5,93.22 | v37.08,92.71 37.08,92.96 36.83,93.22 | v26.67,92.71 26.92,92.96 | v16.76,92.71 17.02,92.96 | v98.3,67.56 98.81,67.56 | v107.19,70.36 107.7,70.36
  Route2 1.016: v43.28,26.42 42.16,26.42
  other vias: 54.86,16.48 114.81,54.58 112.52,52.55 117.09,52.55 114.81,50.01
  pour Route2: 0.25,69.82 95.25,69.82 95.25,94.71 130.56,94.71 130.56,0.25 0.25,0.25
  pour Route2: 0.25,94.49 93.98,94.49 93.98,72.39 95.25,72.39 95.25,71.12 0.25,71.12
ILM
  Top 0.254: U5.12 57.9,17.23 58.67,18 R17.1
IRQ
  Top 0.254: SD1.1 111.43,13 108.97,15.46 R2.1
ISET
  Top 0.254: U5.16 54.11,19.01 53.74,19.38 R18.1
LCD_CS  (via drill 0.5)
  Top 0.254: U1.4 120.33,51.12 122.68,48.77 v124.21,48.77
  Bottom 0.254: v124.21,48.77 124.97,49.53 124.97,57.66 120.65,61.98 91.95,61.98 88.39,65.53 56.26,65.53 LCD1.16
LCD_SCL  (via drill 0.5)
  Top 0.254: U1.1 120,49.17 123.48,45.69 v124.21,45.69
  Bottom 0.254: v124.21,45.69 126.75,48.23 126.75,58.13 121.41,63.47 92.71,63.47 89.15,67.02 47.59,67.02 LCD1.12
LCD_SDI  (via drill 0.5)
  Top 0.254: U1.3 120.22,50.47 122.97,47.72 v124.21,47.72
  Bottom 0.254: v124.21,47.72 125.48,48.99 125.48,57.88 120.9,62.45 92.2,62.45 88.65,66.01 51.66,66.01 LCD1.14
LCD_SDO  (via drill 0.5)
  Top 0.254: U1.2 120.11,49.82 123.22,46.7 v124.21,46.7
  Bottom 0.254: v124.21,46.7 125.98,48.48 125.98,58.17 121.16,62.99 92.46,62.99 88.9,66.55 49.66,66.55 LCD1.13
N$1
  Top 0.254: D2.ANODE R12.2
N$2
  Top 0.254: L2.1 80.63,84.3 81.79,84.3 81.79,84.58 81.99,84.58 D4.2 82.11,86.55 82.04,86.61
  pour Top (no thermals): 82.8,86.61 82.8,93.98 82.3,94.49 81.28,94.49 80.77,93.98 80.77,91.69 81.53,90.93 81.53,86.61
N$3
  Top 0.254: D1.ANODE R13.2
N$4
  Top 0.254: R25.1 62.74,21.81 62.99,22.07 D3.CATHODE | C35.1 69.48,20.03 67.31,20.03 65.28,22.07 D3.CATHODE | SW5.4 SW5.3 2.57,33.61 6.49,29.69 59.69,29.69 64.09,25.28 D3.CATHODE
N$5
  Top 0.254: U7.1 74.81,14.47 75.67,14.47 76.33,13.81 C36.2 79.01,13.81 R27.2
N$6
  Top 0.254: OP1.2 102.23,25.1 R28.2
N$7
  Top 0.254: L3.2 85.49,84.3 84.33,84.3 84.33,84.58 84.12,84.58 D4.1 84.01,86.55 84.07,86.61
  pour Top (no thermals): 83.31,93.98 83.31,86.61 84.58,86.61 84.58,90.93 85.34,91.69 85.34,93.98 84.87,94.49 83.79,94.49
N$8
  Top 0.254: L5.1 70.87,84.3 72.14,84.3 72.14,84.38 D5.2 72.46,87.19 72.64,87.38
  pour Top (no thermals): 73.15,86.61 73.15,93.98 72.64,94.49 71.63,94.49 71.12,93.98 71.12,91.69 71.88,90.93 71.88,86.61
N$9
  Top 0.254: L4.2 75.95,84.3 74.68,84.3 74.68,84.38 D5.1 74.36,87.31 74.42,87.38
  pour Top (no thermals): 73.66,93.98 73.66,86.61 74.93,86.61 74.93,90.93 75.69,91.69 75.69,93.98 75.21,94.49 74.14,94.49
N$10
  Top 0.254: L7.1 60.96,84.3 62.23,84.3 62.23,84.58 62.43,84.58 D6.2 62.55,87.56 62.48,87.63
  pour Top (no thermals): 63.25,86.61 63.25,93.98 62.74,94.49 61.72,94.49 61.21,93.98 61.21,91.69 61.98,90.93 61.98,86.61
N$11
  Top 0.254: L6.2 66.04,84.3 64.77,84.3 64.45,84.62 D6.1 64.45,88.07 64.52,88.14
  pour Top (no thermals): 63.75,93.98 63.75,86.61 65.02,86.61 65.02,90.93 65.79,91.69 65.79,93.98 65.31,94.49 64.23,94.49
N$12
  Top 0.254: L9.1 51.05,84.3 52.32,84.3 52.32,84.58 52.53,84.58 D7.2 52.64,87.44 52.83,87.63
  pour Top (no thermals): 53.34,86.61 53.34,93.98 52.83,94.49 51.82,94.49 51.31,93.98 51.31,91.69 52.07,90.93 52.07,86.61
N$13
  Top 0.254: L8.2 56.13,84.3 54.86,84.3 54.86,84.58 54.66,84.58 D7.1 54.54,87.7 54.36,87.88 54.61,87.88 54.61,87.63
  pour Top (no thermals): 53.85,93.98 53.85,86.61 55.12,86.61 55.12,90.93 55.88,91.69 55.88,93.98 55.4,94.49 54.33,94.49
N$14
  Top 0.254: L17.1 10.41,84.3 11.68,84.3 11.68,84.84 11.87,84.84 | D11.2 11.87,84.84 | 11.87,84.84 11.87,87.56 11.94,87.63
  pour Top (no thermals): 12.7,86.61 12.7,93.98 12.19,94.49 11.18,94.49 10.67,93.98 10.67,91.69 11.43,90.93 11.43,86.61
N$15
  Top 0.254: L16.2 15.49,84.3 14.22,84.3 13.9,84.62 D11.1 13.9,87.31 13.97,87.38
  pour Top (no thermals): 13.21,93.98 13.21,86.61 14.48,86.61 14.48,90.93 15.24,91.69 15.24,93.98 14.76,94.49 13.69,94.49
N$16
  Top 0.254: L15.1 20.32,84.3 21.59,84.3 21.59,84.38 D10.2 21.91,87.31 21.84,87.38
  pour Top (no thermals): 22.61,86.61 22.61,93.98 22.1,94.49 21.08,94.49 20.57,93.98 20.57,91.69 21.34,90.93 21.34,86.61
N$17
  Top 0.254: L14.2 25.4,84.3 24.13,84.3 24.13,84.58 23.93,84.58 D10.1 23.81,86.8 24.13,87.12
  pour Top (no thermals): 23.11,93.98 23.11,86.61 24.38,86.61 24.38,90.93 25.15,91.69 25.15,93.98 24.67,94.49 23.59,94.49
N$18
  Top 0.254: L13.1 30.73,84.3 32,84.3 32.32,84.62 D9.2 32.32,87.82 32.26,87.88
  pour Top (no thermals): 33.02,86.61 33.02,93.98 32.51,94.49 31.5,94.49 30.99,93.98 30.99,91.69 31.75,90.93 31.75,86.61
N$19
  Top 0.254: L12.2 35.81,84.3 34.54,84.3 34.22,84.62 D9.1 34.22,87.31 34.54,87.63
  pour Top (no thermals): 33.53,93.98 33.53,86.61 34.8,86.61 34.8,90.93 35.56,91.69 35.56,93.98 35.08,94.49 34.01,94.49
N$20
  Top 0.254: L11.1 41.15,84.3 42.42,84.3 42.42,84.58 42.62,84.58 D8.2 42.74,87.56 42.67,87.63
  pour Top (no thermals): 43.43,86.61 43.43,93.98 42.93,94.49 41.91,94.49 41.4,93.98 41.4,91.69 42.16,90.93 42.16,86.61
N$21
  Top 0.254: L10.2 46.23,84.3 44.96,84.3 44.64,84.62 D8.1 44.64,87.56 44.96,87.88
  pour Top (no thermals): 43.94,93.98 43.94,86.61 45.21,86.61 45.21,90.93 45.97,91.69 45.97,93.98 45.5,94.49 44.42,94.49
N$22
  Top 0.254: D12.ANODE R32.2
N$24
  Top 0.254: R34.2 99.69,25.13 OP1.4
N$25
  Top 0.254: L18.1 86.11,71.88 | 86.11,71.88 R35.2 | C23.1 86.11,71.88
N$28
  Top 0.254: U21.3 R37.1
P12  (via drill 0.5)
  Top 0.254: U1.13 117.41,57.46 117.6,57.66 117.6,65.28 v117.35,65.53
  Bottom 0.254: v117.35,65.53 123.7,71.12 FU.3
P13  (via drill 0.5)
  Top 0.254: U1.14 116.76,57.58 117.09,57.91 117.09,64.77 v116.33,65.53
  Bottom 0.254: v116.33,65.53 125.22,73.66 FU.4
P14  (via drill 0.5)
  Top 0.254: U1.15 116.11,57.69 116.59,58.17 116.59,64.26 v115.32,65.53
  Bottom 0.254: v115.32,65.53 126.75,76.2 FU.5
P15  (via drill 0.5)
  Top 0.254: U1.16 115.46,57.67 115.95,58.17 115.95,63.88 v114.3,65.53
  Bottom 0.254: v114.3,65.53 127.76,78.74 FU.6
P16  (via drill 0.5)
  Top 0.254: U1.19 113.51,57.69 113.03,58.17 113.03,65.28 v113.28,65.53
  Bottom 0.254: v113.28,65.53 125.98,78.23 125.98,80.26 127,81.28 FU.7
P17  (via drill 0.5)
  Top 0.254: U1.20 112.86,57.58 112.52,57.91 112.52,65.28 v112.27,65.53
  Bottom 0.254: v112.27,65.53 125.22,78.49 125.22,82.04 127,83.82 FU.8
P18  (via drill 0.5)
  Top 0.254: U1.21 112.21,57.46 112.01,57.66 112.01,64.77 v111.25,65.53
  Bottom 0.254: v111.25,65.53 124.46,78.74 124.46,83.82 127,86.36 FU.9
PGOOD
  Top 0.254: U5.7 55.11,13.69 55.63,13.18 R16.2
PWR_SW
  Top 0.254: U1.32 109.97,49.82 109.25,49.82 108.97,49.53 108.97,48.82 108.97,47.47 102.74,41.24 102.74,32.35 100.08,29.69 72.14,29.69 68.58,26.13 68.58,22.15 D3.ANODE 74.75,22.07 79.76,17.06 R27.1 R26.1
PWREN
  Top 0.254: U5.6 54.61,13.69 53.85,12.92 47.75,12.92 47.05,12.22 U6.4
RES
  Top 0.254: U1.7 120.38,53.07 121.03,52.42 124.59,52.42 | 124.35,51.78 R1.1 124.59,52.42 | 100.3,81.53 SW1.4 | SW1.3 100.3,81.53 | 100.3,81.53 103.85,81.53 107.19,78.2 114.33,78.2 115.82,76.71 115.82,71.63 125.62,61.83 125.62,52.72 125.32,52.42 124.71,52.42 124.59,52.42
RTC_X1
  Top 0.254: U10.1 84.23,25.24 X2.1
RTC_X2
  Top 0.254: U10.2 83.22,23.97 X2.4
RTS
  Top 0.254: C12.1 105.21,83.19 U4.16
RX
  Top 0.254: U4.2 110.04,81.3 112.13,79.22 114.97,79.22 116.84,77.35 116.84,72.36 127.12,62.08 127.12,61.99 127.12,43.01 124.84,40.73 113.92,40.73 112.39,42.26 112.39,45.81 113.51,46.93 U1.37
S_P_G
  Top 0.254: R24.1 65.14,19.02 68.07,19.02 68.47,18.62 C34.2 68.47,15.85 U8.1 68.85,15.46 70.61,15.46 | 70.61,15.46 U7.3 | C35.2 70.61,15.46
SCL  (via drill 0.5)
  Top 0.254: U1.35 112.21,47.15 111.25,46.2 111.25,37.56 113.16,35.66 v113.54,35.66 114.05,35.66 U2.6 120.27,35.66 121.02,36.4 R8.1 | v96.52,21.81 95.63,22.7 U10.6 90.55,22.7 87.7,19.85 U9.5
  Bottom 0.254: v96.52,21.81 105.16,21.81 113.54,30.19 v113.54,35.66
SCL_ADC  (via drill 0.5)
  Top 0.254: U1.10 120.04,55.02 121.67,56.64 121.67,64.2 113.73,72.14 v103.63,72.14 | U12.8 26.57,78.91 27.18,79.52 v27.18,80.52 | U11.8 66.95,78.91 67.56,79.52 v67.56,80.52 | U13.P$2 79.32,88.21 78.74,87.63 78.74,80.77 v78.99,80.52 | U14.P$2 69.67,88.21 69.09,87.63 69.09,80.77 v69.34,80.52 | U15.P$2 59.76,88.21 59.18,87.63 59.18,80.77 v59.44,80.52 | U16.P$2 49.85,88.21 49.28,87.63 49.28,80.77 v49.53,80.52 | U17.P$2 39.95,88.21 39.37,87.63 39.37,80.77 v39.62,80.52 | U18.P$2 29.54,88.21 28.96,87.63 28.96,80.77 v29.21,80.52 | U20.P$2 9.21,88.21 8.64,87.63 v8.64,80.52 | U19.P$2 19.12,88.21 18.54,87.63 18.54,80.77 v18.8,80.52
  Bottom 0.254: v27.18,80.52 27.18,80.01 | 27.18,80.01 29.21,80.01 | 29.21,80.01 39.62,80.01 | 39.62,80.01 49.53,80.01 | 49.53,80.01 59.44,80.01 | 59.44,80.01 67.56,80.01 | 67.56,80.01 69.34,80.01 | 69.34,80.01 78.99,80.01 | 78.99,80.01 89.48,80.01 92.71,76.78 92.71,72.45 93.28,71.88 103.38,71.88 v103.63,72.14 | v67.56,80.52 67.56,80.01 | v78.99,80.52 78.99,80.01 | v69.34,80.52 69.34,80.01 | v59.44,80.52 59.44,80.01 | v49.53,80.52 49.53,80.01 | v39.62,80.52 39.62,80.01 | v29.21,80.52 29.21,80.01 | v8.64,80.52 9.14,80.01 18.8,80.01 | 18.8,80.01 27.18,80.01 | v18.8,80.52 18.8,80.01
SD_CS  (via drill 0.5)
  Top 0.254: SD1.7 118.03,13.09 120.9,15.97 v120.9,17.49 120.9,19.53 120.4,20.03 R6.1 | U1.44 118.06,47.26 119.89,45.43 v119.89,43.91
  Bottom 0.254: v119.89,43.91 123.44,40.35 123.44,20.03 v120.9,17.49
SD_DI  (via drill 0.5)
  Top 0.254: R5.1 118.11,19.78 116.93,18.6 v116.93,17.49 SD1.6 | U1.43 117.41,47.15 118.87,45.69 v118.87,43.91
  Bottom 0.254: v118.87,43.91 121.92,40.86 121.92,22.49 v116.93,17.49
SD_DO  (via drill 0.5)
  Top 0.254: SD1.2 v112.53,17.49 112.53,18.51 111.25,19.78 R3.1 | U1.41 116.11,46.93 116.84,46.2 v116.84,43.91
  Bottom 0.254: v116.84,43.91 116.84,21.81 v112.53,17.49
SD_RW
  Top 0.254: SD1.8 119.13,12.92 122.68,16.48 R7.1
SD_SCLK  (via drill 0.5)
  Top 0.254: SD1.4 v114.73,17.49 114.73,18.34 113.54,19.53 R4.1 | U1.42 116.76,47.04 117.86,45.94 v117.86,43.91
  Bottom 0.254: v117.86,43.91 117.86,20.62 v114.73,17.49
SDA  (via drill 0.5)
  Top 0.254: U1.36 112.86,47.04 111.76,45.94 111.76,38.58 113.41,36.92 113.54,36.92 v114.3,36.92 U2.5 117.73,36.92 118.25,37.45 R9.1 | v96.52,20.54 95.63,21.43 U10.5 90.3,21.43 89.6,20.73 U9.4
  Bottom 0.254: v96.52,20.54 104.65,20.54 114.3,30.19 v114.3,36.92
SDA_ADC  (via drill 0.5)
  Top 0.254: U1.11 119.93,55.67 121.16,56.9 121.16,63.96 113.74,71.37 104.65,71.37 104.39,71.12 v103.63,71.12 | U12.7 28.28,78.91 v28.19,78.99 28.45,79.25 28.45,88.14 29.17,88.86 U18.P$1 | U11.7 68.66,78.91 v68.58,78.99 68.58,88.14 69.3,88.86 U14.P$1 | U13.P$1 78.95,88.86 78.23,88.14 v78.23,78.99 | U15.P$1 59.36,88.86 58.67,88.17 v58.67,78.99 | U16.P$1 49.46,88.86 48.77,88.17 v48.77,78.99 | U17.P$1 39.58,88.86 38.86,88.14 v38.86,78.99 | U20.P$1 8.6,88.86 7.87,88.14 v7.87,79.5 | U19.P$1 18.75,88.86 18.03,88.14 v18.03,78.99
  Bottom 0.254: v28.19,78.99 28.19,79.5 | 28.19,79.5 38.86,79.5 | 38.86,79.5 48.77,79.5 | 48.77,79.5 58.67,79.5 | 58.67,79.5 68.58,79.5 | 68.58,79.5 78.23,79.5 | 78.23,79.5 89.31,79.5 92.2,76.61 92.2,72.09 92.92,71.37 103.38,71.37 v103.63,71.12 | v68.58,78.99 68.58,79.5 | v78.23,78.99 78.23,79.5 | v58.67,78.99 58.67,79.5 | v48.77,78.99 48.77,79.5 | v38.86,78.99 38.86,79.5 | v7.87,79.5 18.03,79.5 | 18.03,79.5 28.19,79.5 | v18.03,78.99 18.03,79.5
SHT_DRAIN
  Top 0.254: R36.1 108.62,66.06 110.4,66.06 111.34,67 U21.1 111.52,68.07 116.3,68.07 118.06,66.31 U1.12
SLEEP
  Top 0.254: U5.4 51.57,15.73 50.55,14.7 46.48,14.7 45.15,13.37 U6.6
SW_DWN
  Top 0.254: SW4.3 94.09,36 | 94.09,36 SW4.4 98.14,37.4 108.46,47.72 108.46,49 108.46,50.04 108.89,50.47 109.93,50.47 U1.31 | R23.1 94.09,36
SW_SEL
  Top 0.254: SW3.3 94.09,48.7 | SW3.4 94.49,48.7 94.09,48.7 | 94.09,48.7 R22.1 94.09,57.23 97.03,60.17 105.16,60.17 106.93,58.39 106.93,54.32 107.54,53.72 U1.26
SW_UP
  Top 0.254: SW2.3 94.09,61.4 | R21.1 94.09,61.4 | 94.09,61.4 94.23,61.4 SW2.4 104.68,61.4 107.44,58.64 107.44,54.83 107.91,54.37 U1.25
SYS_V
  Top 0.254: U5.11 58.42,16.73 58.42,16.48 | U5.10 58.42,16.23 58.42,16.48 | 58.42,16.48 60.07,16.48 C32.1 61.76,15.55 64.77,15.55 | U8.2 64.77,15.55 | C34.1 67.17,15.85 U8.2 | 64.77,15.55 R24.2 R25.2 | U8.2 66.8,15.48 66.8,14.7 67.06,14.45 70.1,14.45 72.64,11.91 83.06,11.91 84.33,13.18 84.33,21.56 85.47,22.7 U10.3
SYS_V_SW
  Top 0.254: U3.OUT 34.05,9.74 C7.1 36.08,9.24 C9.1 64.15,8.49 67.82,12.16 U8.3
TP_T+_0
  Top 0.254: U11.1 78.82,75.01 83.71,79.9 C16.2 arc90 85.6,82.63 L3.1
TP_T+_1
  Top 0.254: L4.1 75.95,82.63 arc-90 C18.2 74.06,77.61 72.76,76.31 U11.3
TP_T+_2
  Top 0.254: L6.1 66.04,82.63 arc-90 C20.2 64.15,77.24 64.43,76.96 U11.11
TP_T+_3
  Top 0.254: 54.23,80.72 C22.2 | L8.1 56.13,82.63 arc-90 C22.2 | U11.13 58.45,75.66 54.24,79.87 C22.2
TP_T+_4
  Top 0.254: L10.1 46.23,82.63 arc-90 C24.2 44.34,79.9 39.45,75.01 U12.1
TP_T+_5
  Top 0.254: L12.1 35.81,82.63 arc-90 C26.2 33.92,77.87 32.37,76.31 U12.3
TP_T+_6
  Top 0.254: L14.1 25.4,82.63 arc-90 C28.2 23.51,77.33 23.88,76.96 U12.11
TP_T+_7
  Top 0.254: U12.13 17.81,75.66 13.6,79.87 C30.2 arc90 15.49,82.63 L16.1
TP_T-_0
  Top 0.254: U11.2 78.2,75.66 82.41,79.87 C16.1 arc-90 80.52,82.63 L2.2
TP_T-_1
  Top 0.254: L5.2 70.87,82.63 arc90 C18.1 72.76,77.24 72.48,76.96 U11.4
TP_T-_2
  Top 0.254: L7.2 60.96,82.63 arc90 C20.1 62.85,77.61 64.15,76.31 U11.12
TP_T-_3
  Top 0.254: L9.2 51.05,82.63 arc90 C22.1 52.96,80.72 52.96,79.88 57.83,75.01 U11.14
TP_T-_4
  Top 0.254: U12.2 38.83,75.66 43.04,79.87 C24.1 arc-90 41.15,82.63 L11.2
TP_T-_5
  Top 0.254: L13.2 30.73,82.63 arc90 C26.1 32.62,77.33 32.26,76.96 U12.4
TP_T-_6
  Top 0.254: L15.2 20.32,82.63 arc90 C28.1 22.21,77.87 23.76,76.31 U12.12
TP_T-_7
  Top 0.254: U12.14 17.19,75.01 12.3,79.9 C30.1 arc-90 10.41,82.63 L17.2
TS
  Top 0.254: U5.1 51.95,17.23 51.7,17.48 R14.1
TX
  Top 0.254: U4.15 106.24,83.84 105.92,84.17 104.9,84.17 104.52,83.79 104.52,81.76 107.57,78.71 114.64,78.71 116.33,77.02 116.33,72.1 126.52,61.91 126.52,61.75 126.52,43.18 124.59,41.24 114.05,41.24 112.9,42.39 112.9,45.56 114.16,46.82 U1.38
TXRX_LED
  Top 0.254: U4.12 109.39,89.21 108.97,89.63 106.17,89.63 105.92,89.88 D2.CATHODE
USB_RST
  Top 0.254: C12.2 102.78,83.15 102.62,83.31 101.6,84.33 101.6,85.6 100.84,86.36 96.77,86.36 96.3,85.88 SW1.1 SW1.2 96.27,77.05 96.27,74.93 97.03,74.17 112.52,74.17 122.17,64.51 122.17,59.44 | U1.9 120.16,54.37 122.17,56.39 122.17,59.44 | R33.2 122.29,59.55 122.17,59.44
USB_V0
  Top 0.406: J1.1 119.92,89.38 121.79,87.5 L1.1
USB_V1  (via drill 0.5)
  Top 0.254: U4.10 110.69,89.94 110.36,90.27 C13.1 | R12.1 109.09,91.27 | 109.09,91.27 C13.1 | R13.1 104.51,91.27 104.9,91.66 104.9,92.93 105.41,93.44 108.71,93.44 109.09,93.06 109.09,91.27 | C14.1 124.95,84.92 125.48,85.44 125.48,89.6 123.16,91.92 111.01,91.92 C13.1 | C33.1 57.4,22.2 57.4,20.83 55.61,19.04 U5.13
  Top 0.406: L1.2 121.99,84.92 122.43,84.92 v123.19,84.92 C14.1 | C33.1 55.66,22.32 v55.63,22.35
  Bottom 0.406: v55.63,22.35 53.34,22.35 49.28,18.29 49.28,4.32 52.32,1.27 120.14,1.27 130.05,11.18 130.05,87.63 129.54,88.14 125.98,88.14 123.19,85.34 v123.19,84.92
USBDM
  Top 0.254: R10.2 119.01,84.92 118.36,85.57 114.55,85.57 113.48,84.49 U4.7
USBDP
  Top 0.254: R11.2 117.33,84.93 114.81,84.93 113.86,83.84 U4.6
VBATT  (via drill 0.5)
  Top 0.254: U5.2 51.82,16.73 v51.82,16.48 | U5.3 51.82,16.22 v51.82,16.48 | C31.1 49.78,16.48 v51.82,16.48 | R29.1 72.79,8.46 BATT1.2
  Bottom 0.254: v51.82,16.48 51.82,15.72 54.86,12.67 71.12,12.67 72.64,11.14 BATT1.2
X0
  Top 0.254: U1.29 103.87,51.77 arc90 102.62,50.51 X1.P$1
X1
  Top 0.254: U1.28 103.89,52.42 arc-90 102.62,53.69 X1.P$2

## Text on the board
tPlace: PWR | TX/RX | RESET | GND | +V | PWR_ON
bPlace: - | +